# Altium PCB Tassel43_RGB.pcbdoc (part 2 of 2)
Units mil, origin at the board's own origin, x right, y up, seen from the top; angles counter-clockwise.
Board outline 9500.18 x 3500.07 mil, 2 copper layers (Top Layer, Bottom Layer); 91 components, 110 nets, 375 pads, 197 vias.
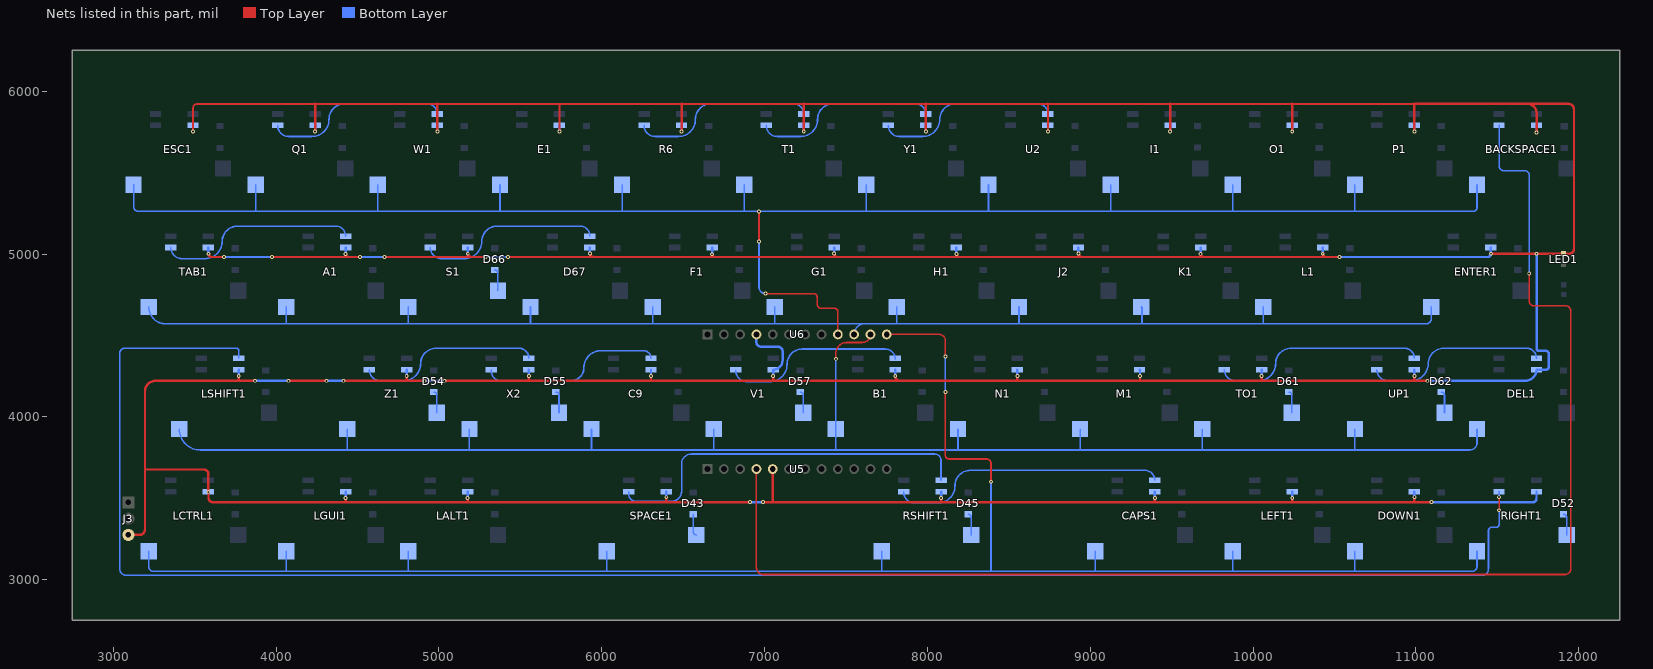
[diagram p2: the nets of this part, all layers, seen from the top]

## Via types
v1: diameter 24, hole 12, Top Layer to Bottom Layer, 197 vias

## Nets (pads, with @x,y where several pads share a name; then routed paths per layer and width w, separated by ;. In a path a pad name is that pad's centre, name@x,y a point inside that pad or via, vN(x,y) a via of type N, cw(c..) or ccw(c..) an arc to the next point about the centre after c; other vN are vias at no path point) (continued)
RGB: BACKSPACE1.6 U5.4 | length 8762.5
  Top Layer w10: U5.4@6950.09,3679.55 6950.08,3074.81 ccw(c6993.19,3074.81) 6993.19,3031.71 11914.43,3031.71 ccw(c11914.43,3067.81) 11950.53,3067.81 11950.53,4650.55 ccw(c11919.37,4650.55) 11919.37,4681.71 11724.75,4681.71 cw(c11724.75,4710.93) 11695.53,4710.93 v1(11695.53,4881.71)
  Bottom Layer w10: BACKSPACE1.6@11510.18,5790.07 cw(c11510.18,5789.72) 11510.53,5789.72 11510.53,5541.71 ccw(c11540.53,5541.71) 11540.53,5511.71 11668.67,5511.71 cw(c11668.67,5484.85) 11695.53,5484.85 v1(11695.53,4881.71)
RIGHT1_4: D52.2 RIGHT1.4 | length 137.8
  Bottom Layer w10: D52.2@11906.44,3402.14 cw(c11906.44,3383.4) 11925.18,3383.4 RIGHT1.4@11925.18,3275.02
RIGHT1_6: LSHIFT1.2 RIGHT1.6 | length 11100.8
  Top Layer w10: v1(11510.53,3426.71) v1(11510.53,3506.71)
  Bottom Layer w10: LSHIFT1.2@3771.26,4360.04 3771.26,4405.98 ccw(c3755.53,4405.98) 3755.53,4421.71 3070.53,4421.71 ccw(c3070.53,4391.71) 3040.53,4391.71 3040.53,3066.71 ccw(c3080.53,3066.71) 3080.53,3026.71 11405.53,3026.71 ccw(c11405.53,3066.71) 11445.53,3066.71 11445.53,3302.03 cw(c11465.2,3302.03) 11465.2,3321.71 11492.67,3321.71 ccw(c11492.67,3339.56) 11510.53,3339.56 v1(11510.53,3426.71) ; RIGHT1.6@11510.18,3540.02 cw(c11510.18,3539.67) 11510.53,3539.67 v1(11510.53,3506.71)
ROW0: BACKSPACE1.3 E1.3 ESC1.3 I1.3 O1.3 P1.3 Q1.3 R6.3 T1.3 U2.3 U6.9 W1.3 Y1.3 | length 11384.4
  Top Layer w10: v1(6965.53,5076.71) v1(6965.53,5261.71) ; v1(7005.53,4756.71) 7301.84,4756.71 cw(c7301.84,4736.06) 7322.49,4736.06 7322.49,4692.58 ccw(c7348.36,4692.58) 7348.36,4666.71 7428.92,4666.71 cw(c7428.92,4645.54) 7450.08,4645.54 v1(7450.08,4506.31)
  Bottom Layer w10: ESC1.3@3125,5425.07 cw(c3125,5424.54) 3125.53,5424.54 3125.53,5291.71 ccw(c3155.53,5291.71) 3155.53,5261.71 3875.82,5261.71 ; Q1.3@3875.02,5425.07 3875.02,5262.51 ccw(c3875.82,5262.51) 3875.82,5261.71 ; W1.3@4625.03,5425.07 4625.03,5262.14 ccw(c4625.46,5262.14) 4625.46,5261.71 ; E1.3@5375.05,5425.07 5375.05,5262.49 ccw(c5375.83,5262.49) 5375.83,5261.71 ; R6.3@6125.07,5425.07 6125.07,5262.12 ccw(c6125.47,5262.12) 6125.47,5261.71 ; 6875.12,5261.71 6125.47,5261.71 ; T1.3@6875.08,5425.07 6875.08,5261.75 v1(6965.53,5261.71) 7624.32,5261.75 ; v1(6965.53,5076.71) 6965.53,4796.71 ccw(c7005.53,4796.71) v1(7005.53,4756.71) ; Y1.3@7625.1,5425.07 7625.1,5262.53 cw(c7624.32,5262.53) 7624.32,5261.75 ; U2.3@8375.11,5425.07 8375.11,5262.18 cw(c8374.68,5262.18) 8374.68,5261.75 ; I1.3@9125.13,5425.07 9125.13,5262.74 ccw(c9126.13,5262.74) 9126.13,5261.75 ; O1.3@9875.15,5425.07 9875.15,5263.64 cw(c9873.25,5263.64) 9873.25,5261.75 ; P1.3@10625.16,5425.07 10625.16,5262.36 ccw(c10625.78,5262.36) 10625.78,5261.75 ; 11350.49,5261.75 10625.78,5261.75 ; 11350.53,5261.71 ccw(c11350.53,5286.36) 11375.18,5286.36 BACKSPACE1.3@11375.18,5425.07 ; 3875.82,5261.71 4625.46,5261.71 ; 4625.46,5261.71 5375.83,5261.71 ; 5375.83,5261.71 6125.47,5261.71 ; 7624.32,5261.75 8374.68,5261.75 ; 8374.68,5261.75 9126.13,5261.75 ; 9126.13,5261.75 9873.25,5261.75 ; 9873.25,5261.75 10625.78,5261.75
  other v1: 7005.53,4756.71
ROW1: A1.3 D67.3 ENTER1.3 F1.3 G1.3 H1.3 J2.3 K1.3 L1.3 S1.3 TAB1.3 U6.10 | length 9066
  Bottom Layer w10: TAB1.3@3218.75,4675.05 ccw(c3322.1,4675.05) 3313.52,4572.06 ccw(c3313.82,4572.06) 3313.82,4571.76 3318.78,4571.76 ; 3322.1,4571.71 cw(c3322.1,4675.05) 3318.78,4571.76 ; A1.3@4062.52,4675.05 4062.52,4571.76 3318.78,4571.76 ; 4062.58,4571.71 4812.91,4571.71 ; S1.3@4812.54,4675.05 4812.54,4572.08 ccw(c4812.91,4572.08) 4812.91,4571.71 ; D67.3@5562.55,4675.05 5562.55,4572.32 cw(c5561.94,4572.32) 5561.94,4571.71 ; F1.3@6312.57,4675.05 6312.57,4571.73 7063.42,4571.73 ; 6312.59,4571.71 5561.94,4571.71 ; G1.3@7062.59,4675.05 7062.59,4572.56 ccw(c7063.42,4572.56) 7063.42,4571.73 ; U6.10@7550.09,4506.32 cw(c7615.5,4506.31) 7615.5,4571.72 ; H1.3@7812.6,4675.05 7812.6,4573.84 cw(c7810.48,4573.84) 7810.48,4571.72 ; J2.3@8562.62,4675.05 8562.62,4571.95 cw(c8562.38,4571.95) 8562.38,4571.72 ; K1.3@9312.63,4675.05 cw(c9312.63,4670.17) 9317.51,4670.17 9317.51,4571.71 ; L1.3@10062.65,4675.05 10062.65,4572.02 ccw(c10062.96,4572.02) 10062.96,4571.71 ; ENTER1.3@11093.92,4675.05 11093.92,4602.01 cw(c11063.62,4602.01) 11063.62,4571.71 10062.96,4571.71 ; 4812.91,4571.71 5561.94,4571.71 ; 7063.42,4571.73 7615.5,4571.72 ; 7615.5,4571.72 7810.48,4571.72 ; 7810.48,4571.72 8562.38,4571.72 ; 8562.38,4571.72 9317.51,4571.71 ; 9317.51,4571.71 10062.96,4571.71
ROW2: B1.3 C9.3 DEL1.3 LSHIFT1.3 M1.3 N1.3 TO1.3 U6.11 UP1.3 V1.3 X2.3 Z1.3 | length 10052.7
  Top Layer w10: v1(7437.59,4356.71) 7437.59,4388.77 cw(c7505.53,4388.77) 7505.53,4456.71 7600.48,4456.71 ccw(c7600.48,4506.31) U6.11@7650.09,4506.32
  Bottom Layer w10: LSHIFT1.3@3406.26,3925.04 ccw(c3534.59,3925.04) 3534.59,3796.71 4437.2,3796.71 ; Z1.3@4437.53,3925.04 4437.53,3797.04 cw(c4437.2,3797.04) 4437.2,3796.71 ; X2.3@5187.55,3925.04 5187.55,3796.95 ccw(c5187.79,3796.95) 5187.79,3796.71 ; C9.3@5937.56,3925.04 5937.56,3797.21 cw(c5937.06,3797.21) 5937.06,3796.71 ; V1.3@6687.58,3925.04 cw(c6687.58,3924.25) 6688.37,3924.25 6688.37,3796.71 ; v1(7437.59,4356.71) B1.3@7437.59,3925.04 7437.59,3796.87 ccw(c7437.76,3796.87) 7437.76,3796.71 ; N1.3@8187.61,3925.04 8187.61,3797.68 ccw(c8188.59,3797.68) 8188.59,3796.71 ; M1.3@8937.63,3925.04 8937.63,3796.89 cw(c8937.44,3796.89) 8937.44,3796.71 ; TO1.3@9687.64,3925.04 9687.64,3796.8 cw(c9687.55,3796.8) 9687.55,3796.71 ; UP1.3@10625.16,3925.04 10625.16,3798.53 ccw(c10626.98,3798.53) 10626.98,3796.71 ; DEL1.3@11375.18,3925.04 11375.18,3841.02 cw(c11330.86,3841.02) 11330.86,3796.71 10626.98,3796.71 ; 4437.2,3796.71 5187.79,3796.71 ; 5187.79,3796.71 5937.06,3796.71 ; 5937.06,3796.71 6688.37,3796.71 ; 6688.37,3796.71 7437.76,3796.71 ; 7437.76,3796.71 8188.59,3796.71 ; 8188.59,3796.71 8937.44,3796.71 ; 8937.44,3796.71 9687.55,3796.71 ; 9687.55,3796.71 10626.98,3796.71
ROW3: CAPS1.3 DOWN1.3 LALT1.3 LCTRL1.3 LEFT1.3 LGUI1.3 RIGHT1.3 RSHIFT1.3 SPACE1.3 U6.12 | length 11300.4
  Top Layer w10: U6.12@7750.09,4506.32 8072.16,4506.31 cw(c8072.16,4467.94) 8110.53,4467.94 v1(8110.53,4371.71) ; v1(8110.53,4151.71) 8110.53,3761.71 ccw(c8130.53,3761.71) 8130.53,3741.71 8362.02,3741.71 cw(c8362.02,3713.19) 8390.53,3713.19 v1(8390.53,3601.71)
  Bottom Layer w10: LCTRL1.3@3218.75,3175.02 3218.75,3079.87 ccw(c3246.98,3079.87) 3246.98,3051.65 4062.88,3051.65 ; LGUI1.3@4062.52,3175.02 4062.52,3052.01 ccw(c4062.88,3052.01) 4062.88,3051.65 ; LALT1.3@4812.54,3175.02 4812.54,3051.74 ccw(c4812.62,3051.74) 4812.62,3051.66 6031.31,3051.66 ; 4812.63,3051.65 4062.88,3051.65 ; SPACE1.3@6031.31,3175.02 6031.31,3051.66 ; 7718.85,3051.69 RSHIFT1.3@7718.85,3175.02 ; v1(8110.53,4151.71) v1(8110.53,4371.71) ; v1(8390.53,3601.71) 8390.53,3051.65 ; CAPS1.3@9031.38,3175.02 9031.38,3051.93 cw(c9031.1,3051.93) 9031.1,3051.65 ; LEFT1.3@9875.15,3175.02 9875.15,3052.94 cw(c9873.86,3052.94) 9873.86,3051.65 ; DOWN1.3@10625.16,3175.02 10625.16,3051.77 cw(c10625.05,3051.77) 10625.05,3051.65 ; RIGHT1.3@11375.18,3175.02 11375.18,3082.44 cw(c11344.39,3082.44) 11344.39,3051.65 10625.05,3051.65 ; 6031.31,3051.66 8390.53,3051.65 ; 8390.53,3051.65 9031.1,3051.65 ; 9031.1,3051.65 9873.86,3051.65 ; 9873.86,3051.65 10625.05,3051.65
RSHIFT1_4: D45.2 RSHIFT1.4 | length 137.8
  Bottom Layer w10: D45.2@8250.11,3402.14 cw(c8250.11,3383.4) 8268.85,3383.4 RSHIFT1.4@8268.85,3275.02
RSHIFT1_6: CAPS1.2 RSHIFT1.6 | length 1730.9
  Bottom Layer w10: RSHIFT1.6@7853.85,3540.02 ccw(c7922.21,3540.02) 7922.21,3471.66 8064.22,3471.66 ccw(c8064.22,3576.66) 8169.22,3576.66 cw(c8264.22,3576.66) 8264.22,3671.66 9334.74,3671.66 cw(c9334.74,3610.02) CAPS1.2@9396.38,3610.02
S1_4: D66.2 S1.4 | length 137.8
  Bottom Layer w10: D66.2@5343.8,4902.18 cw(c5343.8,4883.43) 5362.54,4883.43 S1.4@5362.54,4775.05
S1_6: D67.2 S1.6 | length 1168.4
  Bottom Layer w10: S1.6@4947.54,5040.05 ccw(c5015.9,5040.05) 5015.9,4971.69 5157.9,4971.69 ccw(c5157.9,5076.69) 5262.9,5076.69 cw(c5357.9,5076.69) 5357.9,5171.69 5865.92,5171.69 cw(c5865.92,5110.05) D67.2@5927.55,5110.05
SPACE1_4: D43.2 SPACE1.4 | length 137.8
  Bottom Layer w10: D43.2@6562.57,3402.14 6562.57,3293.76 ccw(c6581.31,3293.76) SPACE1.4@6581.31,3275.02
SPACE1_6: RSHIFT1.2 SPACE1.6 | length 2340.6
  Bottom Layer w10: SPACE1.6@6166.31,3540.02 6166.31,3524.48 ccw(c6209.09,3524.48) 6209.09,3481.71 6429.02,3481.71 ccw(c6429.02,3543.22) 6490.53,3543.22 6490.53,3711.71 cw(c6550.53,3711.71) 6550.53,3771.71 8045.53,3771.71 cw(c8045.53,3733.39) 8083.85,3733.39 RSHIFT1.2@8083.85,3610.02
T1_2: R6.6 T1.2 | length 1168.4
  Bottom Layer w10: R6.6@6260.07,5790.07 ccw(c6328.43,5790.07) 6328.43,5721.71 6470.43,5721.71 ccw(c6470.43,5826.71) 6575.43,5826.71 cw(c6670.43,5826.71) 6670.43,5921.71 7178.44,5921.71 cw(c7178.44,5860.07) T1.2@7240.08,5860.07
TAB1_6: A1.2 TAB1.6 | length 1262.1
  Bottom Layer w10: TAB1.6@3353.75,5040.05 ccw(c3422.12,5040.05) 3422.12,4971.69 3564.12,4971.69 ccw(c3564.12,5076.69) 3669.12,5076.69 cw(c3764.12,5076.69) 3764.12,5171.69 4365.88,5171.69 cw(c4365.88,5110.05) A1.2@4427.52,5110.05
TO1_4: D61.2 TO1.4 | length 137.8
  Bottom Layer w10: D61.2@10218.9,4152.16 cw(c10218.9,4133.42) 10237.64,4133.42 TO1.4@10237.64,4025.04
TO1_6: TO1.6 UP1.2 | length 1355.9
  Bottom Layer w10: TO1.6@9822.64,4290.04 ccw(c9891,4290.04) 9891,4221.68 10033.01,4221.68 ccw(c10033.01,4326.68) 10138.01,4326.68 cw(c10233.01,4326.68) 10233.01,4421.68 10928.52,4421.68 cw(c10928.52,4360.04) UP1.2@10990.16,4360.04
U2_2: U2.2 Y1.6 | length 1168.4
  Bottom Layer w10: Y1.6@7760.1,5790.07 ccw(c7828.46,5790.07) 7828.46,5721.71 7970.47,5721.71 ccw(c7970.47,5826.71) 8075.47,5826.71 cw(c8170.47,5826.71) 8170.47,5921.71 8678.48,5921.71 cw(c8678.48,5860.07) U2.2@8740.11,5860.07
UP1_4: D62.2 UP1.4 | length 137.8
  Bottom Layer w10: D62.2@11156.42,4152.16 cw(c11156.42,4133.42) 11175.16,4133.42 UP1.4@11175.16,4025.04
UP1_6: DEL1.2 UP1.6 | length 1168.4
  Bottom Layer w10: UP1.6@10760.16,4290.04 ccw(c10828.52,4290.04) 10828.52,4221.68 10970.53,4221.68 ccw(c10970.53,4326.68) 11075.53,4326.68 cw(c11170.53,4326.68) 11170.53,4421.68 11678.54,4421.68 cw(c11678.54,4360.04) DEL1.2@11740.18,4360.04
V1_4: D57.2 V1.4 | length 137.8
  Bottom Layer w10: D57.2@7218.84,4152.16 cw(c7218.84,4133.42) 7237.58,4133.42 V1.4@7237.58,4025.04
V1_6: B1.2 V1.6 | length 1168.4
  Bottom Layer w10: V1.6@6822.58,4285.04 ccw(c6890.94,4285.04) 6890.94,4216.68 7032.94,4216.68 ccw(c7032.94,4321.68) 7137.94,4321.68 cw(c7232.94,4321.68) 7232.94,4416.68 7740.96,4416.68 cw(c7740.96,4355.04) B1.2@7802.59,4355.04
VCC: A1.1 B1.1 BACKSPACE1.1 C9.1 CAPS1.1 D67.1 DEL1.1 DOWN1.1 E1.1 ENTER1.1 ESC1.1 F1.1 G1.1 H1.1 I1.1 J2.1 J3.3 K1.1 L1.1 LALT1.1 LCTRL1.1 LED1.1 LEFT1.1 LGUI1.1 LSHIFT1.1 M1.1 N1.1 O1.1 P1.1 Q1.1 R6.1 RIGHT1.1 RSHIFT1.1 S1.1 SPACE1.1 T1.1 TAB1.1 TO1.1 U2.1 U5.5 U6.4 UP1.1 V1.1 W1.1 X2.1 Y1.1 Z1.1 | length 41980.8
  Top Layer w10: v1(3490.53,5751.71) 3490.53,5896.71 cw(c3515.53,5896.71) 3515.53,5921.71 4241.54,5921.71 4990.53,5921.71 5740.29,5921.71 ; 3582.5,3651.98 cw(c3582.5,3650.72) 3583.75,3650.72 ; v1(5740.53,5751.71) 5740.53,5921.47 ccw(c5740.29,5921.47) 5740.29,5921.71 ; 10989.01,5921.71 10240.01,5921.71 9489.82,5921.71 8738.74,5921.71 7991.51,5921.71 7244.27,5921.71 6490.66,5921.71 5740.29,5921.71
  Top Layer w15: J3.3@3093.74,3275.03 3162.22,3275.02 ccw(c3162.22,3308.33) 3195.53,3308.33 3195.53,3677.33 ; v1(3585.53,5001.71) ccw(c3605.53,5001.71) 3605.53,4981.71 v1(3680.53,4981.71) ; v1(3771.26,4249.93) cw(c3771.26,4249.09) 3772.1,4249.09 3772.1,4221.71 ; v1(3870.53,4221.71) 3772.1,4221.71 ; v1(3975.53,4981.71) 4444.9,4981.71 ; v1(4075.53,4221.71) v1(4310.53,4221.71) ; v1(4240.53,5751.71) 4240.53,5920.69 cw(c4241.54,5920.69) 4241.54,5921.71 ; v1(4415.53,4221.71) 4807.18,4221.71 ; v1(4427.52,3502.08) 4427.52,3478.7 cw(c4425.53,3478.7) 4425.53,3476.71 ; v1(4427.52,4999.08) ccw(c4444.9,4999.08) 4444.9,4981.71 ; v1(4516.1,4981.71) 4444.9,4981.71 ; v1(4665.53,4981.71) 5197.54,4981.71 ; v1(4802.53,4251.3) 4802.53,4226.36 ccw(c4807.18,4226.36) 4807.18,4221.71 ; v1(4910.53,4221.71) 4807.18,4221.71 ; v1(4990.53,5751.71) 4990.53,5921.71 ; v1(5035.53,4221.71) 5552.55,4221.71 ; v1(5176.22,3501.71) 5176.22,3477.39 cw(c5175.53,3477.39) 5175.53,3476.71 ; v1(5177.54,5001.71) ccw(c5197.54,5001.71) 5197.54,4981.71 ; v1(5285.53,4981.71) 5197.54,4981.71 ; v1(5425.53,4981.71) 5948.06,4981.71 ; v1(5552.55,4251.21) 5552.55,4221.71 ; v1(5927.55,5002.21) ccw(c5948.06,5002.21) 5948.06,4981.71 ; v1(6302.56,4251.48) 6302.56,4221.71 ; v1(6396.31,3506.71) 6396.31,3476.71 ; v1(6490.53,5751.71) 6490.53,5921.58 cw(c6490.66,5921.58) 6490.66,5921.71 ; v1(6677.57,4998.56) ccw(c6694.42,4998.56) 6694.42,4981.71 ; v1(6910.53,3476.71) 6396.31,3476.71 ; v1(6990.53,3476.71) 7050.56,3476.71 ; U5.5@7050.09,3679.55 7050.08,3477.18 ccw(c7050.56,3477.18) 7050.56,3476.71 ; v1(7052.58,4249.84) 7052.58,4221.71 ; v1(7240.53,5751.71) 7240.53,5917.97 cw(c7244.27,5917.97) 7244.27,5921.71 ; v1(7427.59,5002.51) 7427.59,4999.65 ccw(c7445.53,4999.65) 7445.53,4981.71 ; v1(7802.59,4251.99) ccw(c7832.87,4251.99) 7832.87,4221.71 ; v1(7990.53,5751.71) 7990.53,5920.72 cw(c7991.51,5920.72) 7991.51,5921.71 ; v1(8083.85,3502.81) 8083.85,3480.03 cw(c8080.53,3480.03) 8080.53,3476.71 ; v1(8177.6,5000.11) ccw(c8196,5000.11) 8196,4981.71 ; v1(8552.61,4252.28) 8552.61,4225.07 ccw(c8555.98,4225.07) 8555.98,4221.71 ; 8738.74,5921.71 cw(c8738.74,5919.91) 8740.53,5919.91 v1(8740.53,5751.71) ; v1(8927.62,5002.51) ccw(c8948.42,5002.51) 8948.42,4981.71 ; v1(9305.53,4251.71) 9305.53,4225.91 ccw(c9309.73,4225.91) 9309.73,4221.71 ; v1(9396.38,3500.72) 9396.38,3477.86 ccw(c9397.53,3477.86) 9397.53,3476.71 ; 9489.82,5921.71 cw(c9489.82,5921) 9490.53,5921 v1(9490.53,5751.71) ; v1(9677.63,5001.59) ccw(c9697.52,5001.59) 9697.52,4981.71 ; v1(10052.64,4250.44) 10052.64,4222.69 ccw(c10053.63,4222.69) 10053.63,4221.71 ; 10240.01,5921.71 cw(c10240.01,5921.19) 10240.53,5921.19 v1(10240.53,5751.71) ; v1(10240.53,3501.71) 10240.53,3477.42 cw(c10239.81,3477.42) 10239.81,3476.71 ; v1(10427.65,5001.71) ccw(c10447.65,5001.71) 10447.65,4981.71 ; v1(10530.53,4981.71) 10447.65,4981.71 ; v1(10990.53,3506.71) 10990.53,3476.84 ccw(c10990.66,3476.84) 10990.66,3476.71 ; v1(10990.53,4251.71) 10990.53,4221.71 ; v1(10990.53,5751.71) 10990.53,5920.19 ccw(c10989.01,5920.19) 10989.01,5921.71 11685.53,5921.71 ; v1(11070.98,4221.71) 10990.53,4221.71 ; v1(11095.53,3476.71) 10990.66,3476.71 ; v1(11460.53,5001.71) v1(11740.55,5001.71) 11905.84,5001.71 ccw(c11905.84,5002.3) LED1.1@11906.43,5002.3 11943.19,5002.3 ccw(c11943.19,5029.64) 11970.53,5029.64 11970.53,5889.24 ccw(c11938.06,5889.24) 11938.06,5921.71 11685.53,5921.71 ; v1(11740.53,5746.71) 11740.53,5866.71 ccw(c11685.53,5866.71) 11685.53,5921.71 ; 3195.53,3677.33 ccw(c3196.15,3677.33) 3196.15,3676.71 3557.77,3676.71 cw(c3557.77,3650.72) 3583.75,3650.72 v1(3583.75,3540.02) cw(c3583.75,3538.25) 3585.53,3538.25 3585.53,3502.09 ccw(c3610.91,3502.09) 3610.91,3476.71 4425.53,3476.71 ; 3195.53,3677.33 3195.53,4156.71 cw(c3260.53,4156.71) 3260.53,4221.71 3772.1,4221.71 ; 4425.53,3476.71 5175.53,3476.71 ; 5175.53,3476.71 6396.31,3476.71 ; 5552.55,4221.71 6302.56,4221.71 ; 5948.06,4981.71 6694.42,4981.71 ; 6302.56,4221.71 7052.58,4221.71 ; 6694.42,4981.71 7445.53,4981.71 ; 7050.56,3476.71 8080.53,3476.71 ; 7052.58,4221.71 7832.87,4221.71 ; 7445.53,4981.71 8196,4981.71 ; 7832.87,4221.71 8555.98,4221.71 ; 8080.53,3476.71 9397.53,3476.71 ; 8196,4981.71 8948.42,4981.71 ; 8555.98,4221.71 9309.73,4221.71 ; 8948.42,4981.71 9697.52,4981.71 ; 9309.73,4221.71 10053.63,4221.71 ; 9397.53,3476.71 10239.81,3476.71 ; 9697.52,4981.71 10447.65,4981.71 ; 10053.63,4221.71 10990.53,4221.71 ; 10239.81,3476.71 10990.66,3476.71
  Bottom Layer w10: ESC1.1@3490,5790.07 v1(3490,5752.23) ccw(c3490.53,5752.23) v1(3490.53,5751.71) ; W1.1@4990.03,5790.07 cw(c4990.03,5789.57) W1.1@4990.53,5789.57 ; BACKSPACE1.1@11740.18,5790.07 cw(c11740.18,5789.72) 11740.53,5789.72 v1(11740.53,5746.71)
  Bottom Layer w15: TAB1.1@3583.75,5040.05 3583.75,5003.48 ccw(c3585.53,5003.48) v1(3585.53,5001.71) ; v1(3680.53,4981.71) v1(3975.53,4981.71) ; v1(3771.26,4249.93) LSHIFT1.1@3771.26,4290.04 ; v1(3870.53,4221.71) v1(4075.53,4221.71) ; Q1.1@4240.02,5790.07 cw(c4240.02,5789.56) 4240.53,5789.56 v1(4240.53,5751.71) ; v1(4310.53,4221.71) v1(4415.53,4221.71) ; v1(4427.52,3502.08) LGUI1.1@4427.52,3540.02 ; v1(4427.52,4999.08) A1.1@4427.52,5040.05 ; v1(4516.1,4981.71) v1(4665.53,4981.71) ; v1(4802.53,4251.3) Z1.1@4802.53,4290.04 ; v1(4910.53,4221.71) v1(5035.53,4221.71) ; v1(4990.53,5751.71) W1.1@4990.53,5789.57 ; v1(5176.22,3501.71) ccw(c5176.22,3503.03) 5177.54,3503.03 LALT1.1@5177.54,3540.02 ; v1(5177.54,5001.71) S1.1@5177.54,5040.05 ; v1(5285.53,4981.71) v1(5425.53,4981.71) ; v1(5552.55,4251.21) X2.1@5552.55,4290.04 ; E1.1@5740.05,5790.07 5740.05,5752.19 ccw(c5740.53,5752.19) v1(5740.53,5751.71) ; v1(5927.55,5002.21) D67.1@5927.55,5040.05 ; v1(6302.56,4251.48) C9.1@6302.56,4290.04 ; v1(6396.31,3506.71) SPACE1.1@6396.31,3540.02 ; R6.1@6490.07,5790.07 cw(c6490.07,5789.61) 6490.53,5789.61 v1(6490.53,5751.71) ; v1(6677.57,4998.56) F1.1@6677.57,5040.05 ; v1(6910.53,3476.71) v1(6990.53,3476.71) ; U6.4@6950.09,4506.32 6950.08,4458.73 ccw(c6977.11,4458.73) 6977.11,4431.71 7080.53,4431.71 cw(c7080.53,4401.71) 7110.53,4401.71 7110.53,4347.99 cw(c7052.58,4347.99) V1.1@7052.58,4290.04 v1(7052.58,4249.84) ; T1.1@7240.08,5790.07 cw(c7240.08,5789.62) 7240.53,5789.62 v1(7240.53,5751.71) ; v1(7427.59,5002.51) G1.1@7427.59,5040.05 ; v1(7802.59,4251.99) B1.1@7802.59,4290.04 ; Y1.1@7990.1,5790.07 cw(c7990.1,5789.64) 7990.53,5789.64 v1(7990.53,5751.71) ; v1(8083.85,3502.81) RSHIFT1.1@8083.85,3540.02 ; v1(8177.6,5000.11) H1.1@8177.6,5040.05 ; v1(8552.61,4252.28) N1.1@8552.61,4290.04 ; U2.1@8740.11,5790.07 cw(c8740.11,5789.65) 8740.53,5789.65 v1(8740.53,5751.71) ; v1(8927.62,5002.51) J2.1@8927.62,5040.05 ; M1.1@9302.63,4290.04 cw(c9302.63,4287.13) 9305.53,4287.13 v1(9305.53,4251.71) ; v1(9396.38,3500.72) CAPS1.1@9396.38,3540.02 ; I1.1@9490.13,5790.07 cw(c9490.13,5789.67) 9490.53,5789.67 v1(9490.53,5751.71) ; v1(9677.63,5001.59) K1.1@9677.63,5040.05 ; v1(10052.64,4250.44) TO1.1@10052.64,4290.04 ; LEFT1.1@10240.15,3540.02 cw(c10240.15,3539.64) 10240.53,3539.64 v1(10240.53,3501.71) ; O1.1@10240.15,5790.07 10240.15,5752.09 ccw(c10240.53,5752.09) v1(10240.53,5751.71) ; v1(10427.65,5001.71) L1.1@10427.65,5040.05 ; v1(10530.53,4981.71) 11440.53,4981.71 ccw(c11440.53,5001.71) v1(11460.53,5001.71) 11460.53,5038.45 ccw(c11458.92,5038.45) ENTER1.1@11458.92,5040.05 ; DOWN1.1@10990.16,3540.02 cw(c10990.16,3539.65) 10990.53,3539.65 v1(10990.53,3506.71) ; UP1.1@10990.16,4290.04 10990.16,4252.07 ccw(c10990.53,4252.07) v1(10990.53,4251.71) ; P1.1@10990.16,5790.07 cw(c10990.16,5789.7) 10990.53,5789.7 v1(10990.53,5751.71) ; v1(11070.98,4221.71) 11671.85,4221.71 ccw(c11671.85,4290.04) DEL1.1@11740.18,4290.04 11798.54,4290.04 ccw(c11798.54,4307.02) 11815.53,4307.02 11815.53,4386.71 ccw(c11795.53,4386.71) 11795.53,4406.71 11753.03,4406.71 cw(c11753.03,4419.19) 11740.55,4419.19 v1(11740.55,5001.71) ; v1(11095.53,3476.71) 11719.15,3476.71 ccw(c11719.15,3497.73) 11740.18,3497.73 RIGHT1.1@11740.18,3540.02
  other v1: 10240.53,3501.71 3490.53,5751.71
W1_2: Q1.6 W1.2 | length 1168.4
  Bottom Layer w10: Q1.6@4010.02,5790.07 ccw(c4078.38,5790.07) 4078.38,5721.71 4220.39,5721.71 ccw(c4220.39,5826.71) 4325.39,5826.71 cw(c4420.39,5826.71) 4420.39,5921.71 4928.4,5921.71 cw(c4928.4,5860.07) W1.2@4990.03,5860.07
X2_4: D55.2 X2.4 | length 137.8
  Bottom Layer w10: D55.2@5718.8,4152.16 cw(c5718.8,4133.42) 5737.55,4133.42 X2.4@5737.55,4025.04
X2_6: C9.2 X2.6 | length 1155.7
  Bottom Layer w10: X2.6@5322.55,4290.04 5322.55,4279.69 ccw(c5380.53,4279.69) 5380.53,4221.71 5810.53,4221.71 ccw(c5810.53,4301.71) 5890.53,4301.71 cw(c5995.53,4301.71) 5995.53,4406.71 6255.89,4406.71 cw(c6255.89,4360.04) C9.2@6302.56,4360.04
Y1_2: T1.6 Y1.2 | length 1168.4
  Bottom Layer w10: T1.6@7010.08,5790.07 ccw(c7078.44,5790.07) 7078.44,5721.71 7220.45,5721.71 ccw(c7220.45,5826.71) 7325.45,5826.71 cw(c7420.45,5826.71) 7420.45,5921.71 7928.46,5921.71 cw(c7928.46,5860.07) Y1.2@7990.1,5860.07
Z1_4: D54.2 Z1.4 | length 137.8
  Bottom Layer w10: D54.2@4968.79,4152.16 cw(c4968.79,4133.42) 4987.53,4133.42 Z1.4@4987.53,4025.04
Z1_6: X2.2 Z1.6 | length 1168.4
  Bottom Layer w10: Z1.6@4572.53,4290.04 ccw(c4640.89,4290.04) 4640.89,4221.68 4782.9,4221.68 ccw(c4782.9,4326.68) 4887.9,4326.68 cw(c4982.9,4326.68) 4982.9,4421.68 5490.91,4421.68 cw(c5490.91,4360.04) X2.2@5552.55,4360.04
"": 

## Polygon pours and split planes (outlines as drawn)
GND on Top Layer (solid, remove dead copper, pour order 0): 12000.18,6000.07 3000,6000.07 3000,3000.15 ccw(c3000.1,3000.15) 3000.1,3000.05 12000.15,3000.05 12000.12,3000 cw(c12000.15,3000.02) 12000.17,3000.04 ccw(c12000.17,3000.05) 12000.18,3000.05
GND on Bottom Layer (solid, remove dead copper, pour order 6): 12000.18,3000.02 3000.13,3000.02 3000.16,3000.07 cw(c3000.13,3000.05) 3000.11,3000.03 3000.1,3000.05 3000.1,5999.97 ccw(c3000,5999.97) 3000,6000.07 12000.05,6000.07 12000.02,6000.03 cw(c12000.05,6000.04) 12000.08,6000.05 cw(c12000.08,5999.95) 12000.18,5999.95

## Keep-outs
Board Outline Layer:
  lines w10 net "": 3000.1,3000.05 3000.1,6000.04 12000.08,6000.04 12000.08,3000.05 3000.1,3000.05
Multi-Layer:
  region: 4382.52,5145.05 4242.52,5145.05 4242.52,5005.05 4382.52,5005.05
  circle w10: c4312.52,4875.05 r78.74
  circle w10: c4512.52,4875.05 r36.42
  circle w10: c4112.52,4875.05 r36.42
  circle w10: c4212.52,4675.05 r59.05
  circle w10: c4462.52,4775.05 r59.05
  region: 7757.59,4395.04 7617.59,4395.04 7617.59,4255.04 7757.59,4255.04
  circle w10: c7687.59,4125.04 r78.74
  circle w10: c7887.59,4125.04 r36.42
  circle w10: c7487.59,4125.04 r36.42
  circle w10: c7587.59,3925.04 r59.05
  circle w10: c7837.59,4025.04 r59.05
  region: 11695.18,5895.07 11555.18,5895.07 11555.18,5755.07 11695.18,5755.07
  circle w10: c11625.18,5625.07 r78.74
  circle w10: c11825.18,5625.07 r36.42
  circle w10: c11425.18,5625.07 r36.42
  circle w10: c11525.18,5425.07 r59.05
  circle w10: c11775.18,5525.07 r59.05
  region: 6257.56,4395.04 6117.56,4395.04 6117.56,4255.04 6257.56,4255.04
  circle w10: c6187.56,4125.04 r78.74
  circle w10: c6387.56,4125.04 r36.42
  circle w10: c5987.56,4125.04 r36.42
  circle w10: c6087.56,3925.04 r59.05
  circle w10: c6337.56,4025.04 r59.05
  region: 9351.38,3645.02 9211.38,3645.02 9211.38,3505.02 9351.38,3505.02
  circle w10: c9281.38,3375.02 r78.74
  circle w10: c9481.38,3375.02 r36.42
  circle w10: c9081.38,3375.02 r36.42
  circle w10: c9181.38,3175.02 r59.05
  circle w10: c9431.38,3275.02 r59.05
  region: 5882.55,5145.05 5742.55,5145.05 5742.55,5005.05 5882.55,5005.05
  circle w10: c5812.55,4875.05 r78.74
  circle w10: c6012.55,4875.05 r36.42
  circle w10: c5612.55,4875.05 r36.42
  circle w10: c5712.55,4675.05 r59.05
  circle w10: c5962.55,4775.05 r59.05
  region: 11695.18,4395.04 11555.18,4395.04 11555.18,4255.04 11695.18,4255.04
  circle w10: c11625.18,4125.04 r78.74
  circle w10: c11825.18,4125.04 r36.42
  circle w10: c11425.18,4125.04 r36.42
  circle w10: c11525.18,3925.04 r59.05
  circle w10: c11775.18,4025.04 r59.05
  region: 10945.16,3645.02 10805.16,3645.02 10805.16,3505.02 10945.16,3505.02
  circle w10: c10875.16,3375.02 r78.74
  circle w10: c11075.16,3375.02 r36.42
  circle w10: c10675.16,3375.02 r36.42
  circle w10: c10775.16,3175.02 r59.05
  circle w10: c11025.16,3275.02 r59.05
  region: 5695.05,5895.07 5555.05,5895.07 5555.05,5755.07 5695.05,5755.07
  circle w10: c5625.05,5625.07 r78.74
  circle w10: c5825.05,5625.07 r36.42
  circle w10: c5425.05,5625.07 r36.42
  circle w10: c5525.05,5425.07 r59.05
  circle w10: c5775.05,5525.07 r59.05
  region: 11413.92,5145.05 11273.92,5145.05 11273.92,5005.05 11413.92,5005.05
  circle w10: c11343.92,4875.05 r78.74
  circle w10: c11543.92,4875.05 r36.42
  circle w10: c11143.92,4875.05 r36.42
  circle w10: c11243.92,4675.05 r59.05
  circle w10: c11493.92,4775.05 r59.05
  region: 3445,5895.07 3305,5895.07 3305,5755.07 3445,5755.07
  circle w10: c3375,5625.07 r78.74
  circle w10: c3575,5625.07 r36.42
  circle w10: c3175,5625.07 r36.42
  circle w10: c3275,5425.07 r59.05
  circle w10: c3525,5525.07 r59.05
  region: 6632.57,5145.05 6492.57,5145.05 6492.57,5005.05 6632.57,5005.05
  circle w10: c6562.57,4875.05 r78.74
  circle w10: c6762.57,4875.05 r36.42
  circle w10: c6362.57,4875.05 r36.42
  circle w10: c6462.57,4675.05 r59.05
  circle w10: c6712.57,4775.05 r59.05
  region: 7382.58,5145.05 7242.58,5145.05 7242.58,5005.05 7382.58,5005.05
  circle w10: c7312.59,4875.05 r78.74
  circle w10: c7512.59,4875.05 r36.42
  circle w10: c7112.59,4875.05 r36.42
  circle w10: c7212.59,4675.05 r59.05
  circle w10: c7462.59,4775.05 r59.05
  region: 8132.6,5145.05 7992.6,5145.05 7992.6,5005.05 8132.6,5005.05
  circle w10: c8062.6,4875.05 r78.74
  circle w10: c8262.6,4875.05 r36.42
  circle w10: c7862.6,4875.05 r36.42
  circle w10: c7962.6,4675.05 r59.05
  circle w10: c8212.6,4775.05 r59.05
  region: 9445.13,5895.07 9305.13,5895.07 9305.13,5755.07 9445.13,5755.07
  circle w10: c9375.13,5625.07 r78.74
  circle w10: c9575.13,5625.07 r36.42
  circle w10: c9175.13,5625.07 r36.42
  circle w10: c9275.13,5425.07 r59.05
  circle w10: c9525.13,5525.07 r59.05
  region: 8882.62,5145.05 8742.62,5145.05 8742.62,5005.05 8882.62,5005.05
  circle w10: c8812.62,4875.05 r78.74
  circle w10: c9012.62,4875.05 r36.42
  circle w10: c8612.62,4875.05 r36.42
  circle w10: c8712.62,4675.05 r59.05
  circle w10: c8962.62,4775.05 r59.05
  region: 9632.63,5145.05 9492.63,5145.05 9492.63,5005.05 9632.63,5005.05
  circle w10: c9562.63,4875.05 r78.74
  circle w10: c9762.63,4875.05 r36.42
  circle w10: c9362.63,4875.05 r36.42
  circle w10: c9462.63,4675.05 r59.05
  circle w10: c9712.63,4775.05 r59.05
  region: 10382.65,5145.05 10242.65,5145.05 10242.65,5005.05 10382.65,5005.05
  circle w10: c10312.65,4875.05 r78.74
  circle w10: c10512.65,4875.05 r36.42
  circle w10: c10112.65,4875.05 r36.42
  circle w10: c10212.65,4675.05 r59.05
  circle w10: c10462.65,4775.05 r59.05
  region: 5132.54,3645.02 4992.54,3645.02 4992.54,3505.02 5132.54,3505.02
  circle w10: c5062.54,3375.02 r78.74
  circle w10: c5262.54,3375.02 r36.42
  circle w10: c4862.54,3375.02 r36.42
  circle w10: c4962.54,3175.02 r59.05
  circle w10: c5212.54,3275.02 r59.05
  region: 3538.75,3645.02 3398.75,3645.02 3398.75,3505.02 3538.75,3505.02
  circle w10: c3468.75,3375.02 r78.74
  circle w10: c3668.75,3375.02 r36.42
  circle w10: c3268.75,3375.02 r36.42
  circle w10: c3368.75,3175.02 r59.05
  circle w10: c3618.75,3275.02 r59.05
  region: 10195.14,3645.02 10055.14,3645.02 10055.14,3505.02 10195.14,3505.02
  circle w10: c10125.15,3375.02 r78.74
  circle w10: c10325.15,3375.02 r36.42
  circle w10: c9925.15,3375.02 r36.42
  circle w10: c10025.15,3175.02 r59.05
  circle w10: c10275.15,3275.02 r59.05
  region: 4382.52,3645.02 4242.52,3645.02 4242.52,3505.02 4382.52,3505.02
  circle w10: c4312.52,3375.02 r78.74
  circle w10: c4512.52,3375.02 r36.42
  circle w10: c4112.52,3375.02 r36.42
  circle w10: c4212.52,3175.02 r59.05
  circle w10: c4462.52,3275.02 r59.05
  region: 3726.26,4395.04 3586.26,4395.04 3586.26,4255.04 3726.26,4255.04
  circle w10: c3656.26,4125.04 r78.74
  circle w10: c3856.26,4125.04 r36.42
  circle w10: c3456.26,4125.04 r36.42
  circle w10: c3556.26,3925.04 r59.05
  circle w10: c3806.26,4025.04 r59.05
  region: 9257.62,4395.04 9117.62,4395.04 9117.62,4255.04 9257.62,4255.04
  circle w10: c9187.63,4125.04 r78.74
  circle w10: c9387.63,4125.04 r36.42
  circle w10: c8987.63,4125.04 r36.42
  circle w10: c9087.63,3925.04 r59.05
  circle w10: c9337.63,4025.04 r59.05
  region: 8507.61,4395.04 8367.61,4395.04 8367.61,4255.04 8507.61,4255.04
  circle w10: c8437.61,4125.04 r78.74
  circle w10: c8637.61,4125.04 r36.42
  circle w10: c8237.61,4125.04 r36.42
  circle w10: c8337.61,3925.04 r59.05
  circle w10: c8587.61,4025.04 r59.05
  region: 10195.14,5895.07 10055.14,5895.07 10055.14,5755.07 10195.14,5755.07
  circle w10: c10125.15,5625.07 r78.74
  circle w10: c10325.15,5625.07 r36.42
  circle w10: c9925.15,5625.07 r36.42
  circle w10: c10025.15,5425.07 r59.05
  circle w10: c10275.15,5525.07 r59.05
  region: 10945.16,5895.07 10805.16,5895.07 10805.16,5755.07 10945.16,5755.07
  circle w10: c10875.16,5625.07 r78.74
  circle w10: c11075.16,5625.07 r36.42
  circle w10: c10675.16,5625.07 r36.42
  circle w10: c10775.16,5425.07 r59.05
  circle w10: c11025.16,5525.07 r59.05
  region: 4195.02,5895.07 4055.02,5895.07 4055.02,5755.07 4195.02,5755.07
  circle w10: c4125.02,5625.07 r78.74
  circle w10: c4325.02,5625.07 r36.42
  circle w10: c3925.02,5625.07 r36.42
  circle w10: c4025.02,5425.07 r59.05
  circle w10: c4275.02,5525.07 r59.05
  region: 6445.06,5895.07 6305.06,5895.07 6305.06,5755.07 6445.06,5755.07
  circle w10: c6375.07,5625.07 r78.74
  circle w10: c6575.07,5625.07 r36.42
  circle w10: c6175.07,5625.07 r36.42
  circle w10: c6275.07,5425.07 r59.05
  circle w10: c6525.07,5525.07 r59.05
  region: 11695.18,3645.02 11555.18,3645.02 11555.18,3505.02 11695.18,3505.02
  circle w10: c11625.18,3375.02 r78.74
  circle w10: c11825.18,3375.02 r36.42
  circle w10: c11425.18,3375.02 r36.42
  circle w10: c11525.18,3175.02 r59.05
  circle w10: c11775.18,3275.02 r59.05
  region: 8038.85,3645.02 7898.85,3645.02 7898.85,3505.02 8038.85,3505.02
  circle w10: c7968.85,3375.02 r78.74
  circle w10: c8168.85,3375.02 r36.42
  circle w10: c7768.85,3375.02 r36.42
  circle w10: c7868.85,3175.02 r59.05
  circle w10: c8118.85,3275.02 r59.05
  region: 5132.54,5145.05 4992.54,5145.05 4992.54,5005.05 5132.54,5005.05
  circle w10: c5062.54,4875.05 r78.74
  circle w10: c5262.54,4875.05 r36.42
  circle w10: c4862.54,4875.05 r36.42
  circle w10: c4962.54,4675.05 r59.05
  circle w10: c5212.54,4775.05 r59.05
  region: 6351.31,3645.02 6211.31,3645.02 6211.31,3505.02 6351.31,3505.02
  circle w10: c6281.31,3375.02 r78.74
  circle w10: c6481.31,3375.02 r36.42
  circle w10: c6081.31,3375.02 r36.42
  circle w10: c6181.31,3175.02 r59.05
  circle w10: c6431.31,3275.02 r59.05
  region: 7195.08,5895.07 7055.08,5895.07 7055.08,5755.07 7195.08,5755.07
  circle w10: c7125.08,5625.07 r78.74
  circle w10: c7325.08,5625.07 r36.42
  circle w10: c6925.08,5625.07 r36.42
  circle w10: c7025.08,5425.07 r59.05
  circle w10: c7275.08,5525.07 r59.05
  region: 3538.75,5145.05 3398.75,5145.05 3398.75,5005.05 3538.75,5005.05
  circle w10: c3468.75,4875.05 r78.74
  circle w10: c3668.75,4875.05 r36.42
  circle w10: c3268.75,4875.05 r36.42
  circle w10: c3368.75,4675.05 r59.05
  circle w10: c3618.75,4775.05 r59.05
  region: 10007.64,4395.04 9867.64,4395.04 9867.64,4255.04 10007.64,4255.04
  circle w10: c9937.64,4125.04 r78.74
  circle w10: c10137.64,4125.04 r36.42
  circle w10: c9737.64,4125.04 r36.42
  circle w10: c9837.64,3925.04 r59.05
  circle w10: c10087.64,4025.04 r59.05
  region: 8695.11,5895.07 8555.11,5895.07 8555.11,5755.07 8695.11,5755.07
  circle w10: c8625.11,5625.07 r78.74
  circle w10: c8825.11,5625.07 r36.42
  circle w10: c8425.11,5625.07 r36.42
  circle w10: c8525.11,5425.07 r59.05
  circle w10: c8775.11,5525.07 r59.05
  region: 10945.16,4395.04 10805.16,4395.04 10805.16,4255.04 10945.16,4255.04
  circle w10: c10875.16,4125.04 r78.74
  circle w10: c11075.16,4125.04 r36.42
  circle w10: c10675.16,4125.04 r36.42
  circle w10: c10775.16,3925.04 r59.05
  circle w10: c11025.16,4025.04 r59.05
  region: 7007.58,4395.04 6867.58,4395.04 6867.58,4255.04 7007.58,4255.04
  circle w10: c6937.58,4125.04 r78.74
  circle w10: c7137.58,4125.04 r36.42
  circle w10: c6737.58,4125.04 r36.42
  circle w10: c6837.58,3925.04 r59.05
  circle w10: c7087.58,4025.04 r59.05
  region: 4945.03,5895.07 4805.03,5895.07 4805.03,5755.07 4945.03,5755.07
  circle w10: c4875.03,5625.07 r78.74
  circle w10: c5075.03,5625.07 r36.42
  circle w10: c4675.03,5625.07 r36.42
  circle w10: c4775.03,5425.07 r59.05
  circle w10: c5025.03,5525.07 r59.05
  region: 5507.54,4395.04 5367.54,4395.04 5367.54,4255.04 5507.54,4255.04
  circle w10: c5437.55,4125.04 r78.74
  circle w10: c5637.55,4125.04 r36.42
  circle w10: c5237.55,4125.04 r36.42
  circle w10: c5337.55,3925.04 r59.05
  circle w10: c5587.55,4025.04 r59.05
  region: 7945.1,5895.07 7805.1,5895.07 7805.1,5755.07 7945.1,5755.07
  circle w10: c7875.1,5625.07 r78.74
  circle w10: c8075.1,5625.07 r36.42
  circle w10: c7675.1,5625.07 r36.42
  circle w10: c7775.1,5425.07 r59.05
  circle w10: c8025.1,5525.07 r59.05
  region: 4757.53,4395.04 4617.53,4395.04 4617.53,4255.04 4757.53,4255.04
  circle w10: c4687.53,4125.04 r78.74
  circle w10: c4887.53,4125.04 r36.42
  circle w10: c4487.53,4125.04 r36.42
  circle w10: c4587.53,3925.04 r59.05
  circle w10: c4837.53,4025.04 r59.05

## Other copper
Top Layer:
  drawing of 223 lines, arcs and shapes, not listed
Bottom Layer:
  drawing of 474 lines, arcs and shapes, not listed

## Silkscreen, mask and mechanical layers (free items; w line width, h text height)
Top Silkscreen Layer:
  drawing of 164 lines, arcs and shapes, not listed
  text "Tassel43" at 6830.05,3239.66 h135
Top Solder Mask Layer:
  text "Tassel43" at 6830.05,3239.66 h135